# Altium PCB CR-10 Motherboard.PcbDoc (part 9 of 14)
Units mil, origin at the board's own origin, x right, y up, seen from the top; angles counter-clockwise.
Board outline 3970.48 x 2769.68 mil, 2 copper layers (TopLayer, BottomLayer); 147 components, 128 nets, 667 pads, 614 vias.
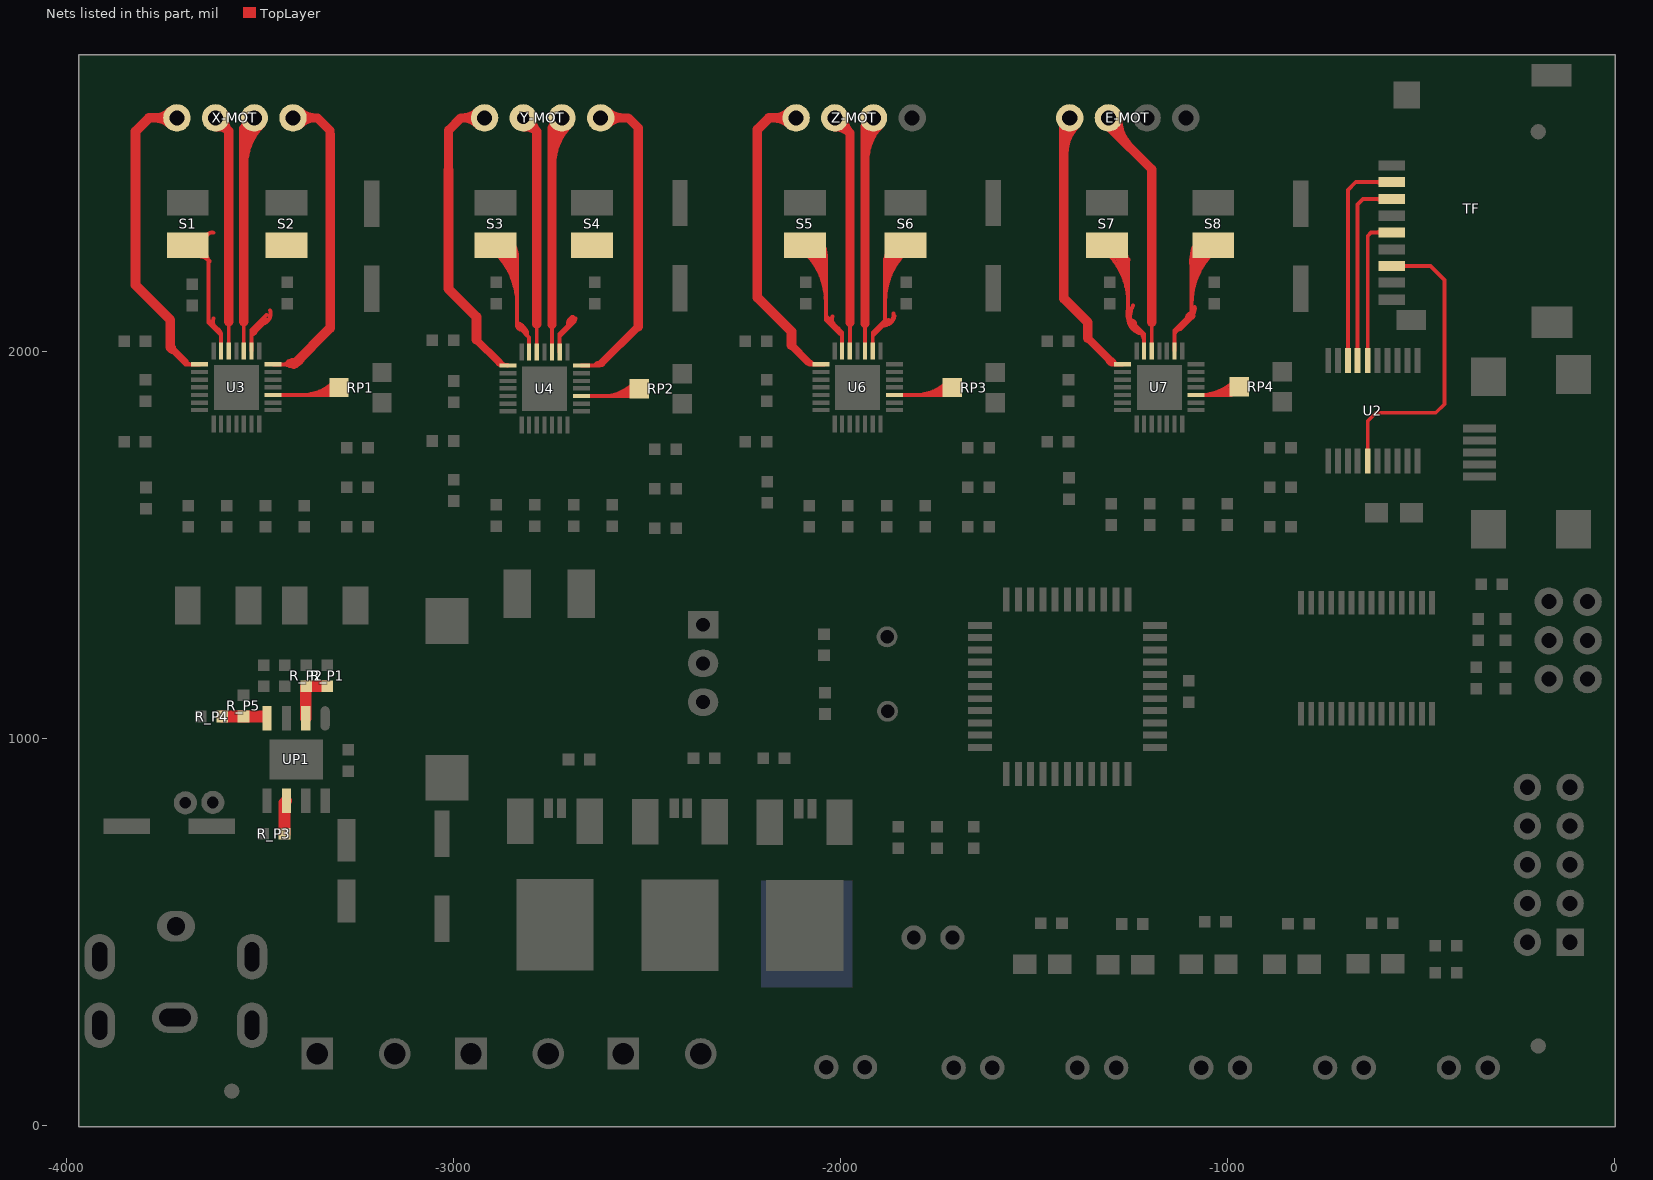
[diagram p9: the nets of this part, all layers, seen from the top]

## Via types
v1: diameter 28, hole 18, TopLayer to BottomLayer, tented both sides, 246 vias
v2: diameter 27.56, hole 19.68, TopLayer to BottomLayer, tented both sides, 196 vias
v3: diameter 20, hole 12, TopLayer to BottomLayer, tented both sides, 124 vias
v4: diameter 27.56, hole 11.81, TopLayer to BottomLayer, tented bottom, 16 vias
v5: diameter 27.56, hole 19.68, TopLayer to BottomLayer, 16 vias
v6: diameter 20, hole 12, TopLayer to BottomLayer, 12 vias
v7: diameter 28, hole 11.81, TopLayer to BottomLayer, tented both sides, 4 vias

## Nets (pads, with @x,y where several pads share a name; then routed paths per layer and width w, separated by ;. In a path a pad name is that pad's centre, name@x,y a point inside that pad or via, vN(x,y) a via of type N, cw(c..) or ccw(c..) an arc to the next point about the centre after c; other vN are vias at no path point) (continued)
NetR_P1_2: R_P1.2 R_P2.1 UP1.2 | length 138.1
  TopLayer w30: UP1.2@-3381.54,1053.14 -3381.54,1134.84 R_P2.1@-3380.54,1135.84 R_P1.2@-3325.54,1135.84
NetR_P3_1: R_P3.1 UP1.6 | length 87.8
  TopLayer w30: R_P3.1@-3436.54,754.84 -3436.54,835.54 UP1.6@-3431.54,840.54
NetR_P4_1: R_P4.1 R_P5.1 UP1.4 | length 111.3
  TopLayer w30: R_P4.1@-3597.54,1057.84 R_P5.1@-3542.54,1057.84 UP1.4@-3486.24,1057.84
NetRP1_1: RP1.1 U3.17 | length 1628.2
  TopLayer w10: U3.17@-3465.62,1888.88 -3314.62,1888.88 RP1.1@-3295.62,1907.88 ; -3389.78,1888.88 ccw(c-3389.78,2002.04) RP1.1@-3309.76,1922.02 ; -3389.78,1888.88 ccw(c-3389.78,2002.04) RP1.1@-3309.76,1922.02 ; -3389.78,1888.88 ccw(c-3389.78,2002.04) RP1.1@-3309.76,1922.02 ; -3389.78,1888.88 ccw(c-3389.78,2002.04) RP1.1@-3309.76,1922.02 ; -3389.78,1888.88 ccw(c-3389.78,2002.04) RP1.1@-3309.76,1922.02 ; -3389.78,1888.88 ccw(c-3389.78,2002.04) RP1.1@-3309.76,1922.02 ; -3365.64,1888.88 ccw(c-3365.64,1977.89) RP1.1@-3302.69,1914.95 ; -3365.64,1888.88 ccw(c-3365.64,1977.89) RP1.1@-3302.69,1914.95 ; -3365.64,1888.88 ccw(c-3365.64,1977.89) RP1.1@-3302.69,1914.95 ; -3365.64,1888.88 ccw(c-3365.64,1977.89) RP1.1@-3302.69,1914.95 ; -3365.64,1888.88 ccw(c-3365.64,1977.89) RP1.1@-3302.69,1914.95 ; -3365.64,1888.88 ccw(c-3365.64,1977.89) RP1.1@-3302.69,1914.95 ; -3341.49,1888.88 ccw(c-3341.49,1953.75) RP1.1@-3295.62,1907.88 ; -3341.49,1888.88 ccw(c-3341.49,1953.75) RP1.1@-3295.62,1907.88 ; -3341.49,1888.88 ccw(c-3341.49,1953.75) RP1.1@-3295.62,1907.88 ; -3341.49,1888.88 ccw(c-3341.49,1953.75) RP1.1@-3295.62,1907.88 ; -3341.49,1888.88 ccw(c-3341.49,1953.75) RP1.1@-3295.62,1907.88 ; -3341.49,1888.88 ccw(c-3341.49,1953.75) RP1.1@-3295.62,1907.88 ; RP1.1@-3317.35,1888.88 ccw(c-3317.35,1929.61) RP1.1@-3288.55,1900.81 ; RP1.1@-3317.35,1888.88 ccw(c-3317.35,1929.61) RP1.1@-3288.55,1900.81 ; RP1.1@-3317.35,1888.88 ccw(c-3317.35,1929.61) RP1.1@-3288.55,1900.81 ; RP1.1@-3317.35,1888.88 ccw(c-3317.35,1929.61) RP1.1@-3288.55,1900.81 ; RP1.1@-3317.35,1888.88 ccw(c-3317.35,1929.61) RP1.1@-3288.55,1900.81 ; RP1.1@-3317.35,1888.88 ccw(c-3317.35,1929.61) RP1.1@-3288.55,1900.81
NetRP2_1: RP2.1 U4.17 | length 1608.2
  TopLayer w10: U4.17@-2669.54,1885.84 -2538.54,1885.84 RP2.1@-2519.54,1904.84 ; -2613.69,1885.84 ccw(c-2613.69,1999) RP2.1@-2533.68,1918.98 ; -2613.69,1885.84 ccw(c-2613.69,1999) RP2.1@-2533.68,1918.98 ; -2613.69,1885.84 ccw(c-2613.69,1999) RP2.1@-2533.68,1918.98 ; -2613.69,1885.84 ccw(c-2613.69,1999) RP2.1@-2533.68,1918.98 ; -2613.69,1885.84 ccw(c-2613.69,1999) RP2.1@-2533.68,1918.98 ; -2613.69,1885.84 ccw(c-2613.69,1999) RP2.1@-2533.68,1918.98 ; -2589.55,1885.84 ccw(c-2589.55,1974.85) RP2.1@-2526.61,1911.91 ; -2589.55,1885.84 ccw(c-2589.55,1974.85) RP2.1@-2526.61,1911.91 ; -2589.55,1885.84 ccw(c-2589.55,1974.85) RP2.1@-2526.61,1911.91 ; -2589.55,1885.84 ccw(c-2589.55,1974.85) RP2.1@-2526.61,1911.91 ; -2589.55,1885.84 ccw(c-2589.55,1974.85) RP2.1@-2526.61,1911.91 ; -2589.55,1885.84 ccw(c-2589.55,1974.85) RP2.1@-2526.61,1911.91 ; -2565.41,1885.84 ccw(c-2565.41,1950.71) RP2.1@-2519.54,1904.84 ; -2565.41,1885.84 ccw(c-2565.41,1950.71) RP2.1@-2519.54,1904.84 ; -2565.41,1885.84 ccw(c-2565.41,1950.71) RP2.1@-2519.54,1904.84 ; -2565.41,1885.84 ccw(c-2565.41,1950.71) RP2.1@-2519.54,1904.84 ; -2565.41,1885.84 ccw(c-2565.41,1950.71) RP2.1@-2519.54,1904.84 ; -2565.41,1885.84 ccw(c-2565.41,1950.71) RP2.1@-2519.54,1904.84 ; RP2.1@-2541.26,1885.84 ccw(c-2541.26,1926.57) RP2.1@-2512.46,1897.77 ; RP2.1@-2541.26,1885.84 ccw(c-2541.26,1926.57) RP2.1@-2512.46,1897.77 ; RP2.1@-2541.26,1885.84 ccw(c-2541.26,1926.57) RP2.1@-2512.46,1897.77 ; RP2.1@-2541.26,1885.84 ccw(c-2541.26,1926.57) RP2.1@-2512.46,1897.77 ; RP2.1@-2541.26,1885.84 ccw(c-2541.26,1926.57) RP2.1@-2512.46,1897.77 ; RP2.1@-2541.26,1885.84 ccw(c-2541.26,1926.57) RP2.1@-2512.46,1897.77
NetRP3_1: RP3.1 U6.17 | length 1608.2
  TopLayer w10: U6.17@-1860.62,1888.88 -1729.62,1888.88 RP3.1@-1710.62,1907.88 ; -1804.78,1888.88 ccw(c-1804.78,2002.04) RP3.1@-1724.76,1922.02 ; -1804.78,1888.88 ccw(c-1804.78,2002.04) RP3.1@-1724.76,1922.02 ; -1804.78,1888.88 ccw(c-1804.78,2002.04) RP3.1@-1724.76,1922.02 ; -1804.78,1888.88 ccw(c-1804.78,2002.04) RP3.1@-1724.76,1922.02 ; -1804.78,1888.88 ccw(c-1804.78,2002.04) RP3.1@-1724.76,1922.02 ; -1804.78,1888.88 ccw(c-1804.78,2002.04) RP3.1@-1724.76,1922.02 ; -1780.64,1888.88 ccw(c-1780.64,1977.89) RP3.1@-1717.69,1914.95 ; -1780.64,1888.88 ccw(c-1780.64,1977.89) RP3.1@-1717.69,1914.95 ; -1780.64,1888.88 ccw(c-1780.64,1977.89) RP3.1@-1717.69,1914.95 ; -1780.64,1888.88 ccw(c-1780.64,1977.89) RP3.1@-1717.69,1914.95 ; -1780.64,1888.88 ccw(c-1780.64,1977.89) RP3.1@-1717.69,1914.95 ; -1780.64,1888.88 ccw(c-1780.64,1977.89) RP3.1@-1717.69,1914.95 ; -1756.49,1888.88 ccw(c-1756.49,1953.75) RP3.1@-1710.62,1907.88 ; -1756.49,1888.88 ccw(c-1756.49,1953.75) RP3.1@-1710.62,1907.88 ; -1756.49,1888.88 ccw(c-1756.49,1953.75) RP3.1@-1710.62,1907.88 ; -1756.49,1888.88 ccw(c-1756.49,1953.75) RP3.1@-1710.62,1907.88 ; -1756.49,1888.88 ccw(c-1756.49,1953.75) RP3.1@-1710.62,1907.88 ; -1756.49,1888.88 ccw(c-1756.49,1953.75) RP3.1@-1710.62,1907.88 ; RP3.1@-1732.35,1888.88 ccw(c-1732.35,1929.61) RP3.1@-1703.55,1900.81 ; RP3.1@-1732.35,1888.88 ccw(c-1732.35,1929.61) RP3.1@-1703.55,1900.81 ; RP3.1@-1732.35,1888.88 ccw(c-1732.35,1929.61) RP3.1@-1703.55,1900.81 ; RP3.1@-1732.35,1888.88 ccw(c-1732.35,1929.61) RP3.1@-1703.55,1900.81 ; RP3.1@-1732.35,1888.88 ccw(c-1732.35,1929.61) RP3.1@-1703.55,1900.81 ; RP3.1@-1732.35,1888.88 ccw(c-1732.35,1929.61) RP3.1@-1703.55,1900.81
NetRP4_1: RP4.1 U7.17 | length 1170.8
  TopLayer w10: U7.17@-1080.62,1888.88 -990.5,1888.88 RP4.1@-969.54,1909.84 ; U7.17@-1068.42,1888.88 ccw(c-1068.42,2008.73) RP4.1@-983.68,1923.98 ; U7.17@-1068.42,1888.88 ccw(c-1068.42,2008.73) RP4.1@-983.68,1923.98 ; U7.17@-1068.42,1888.88 ccw(c-1068.42,2008.73) RP4.1@-983.68,1923.98 ; U7.17@-1068.42,1888.88 ccw(c-1068.42,2008.73) RP4.1@-983.68,1923.98 ; -1044.28,1888.88 ccw(c-1044.28,1984.59) RP4.1@-976.61,1916.91 ; -1044.28,1888.88 ccw(c-1044.28,1984.59) RP4.1@-976.61,1916.91 ; -1044.28,1888.88 ccw(c-1044.28,1984.59) RP4.1@-976.61,1916.91 ; -1044.28,1888.88 ccw(c-1044.28,1984.59) RP4.1@-976.61,1916.91 ; -1020.14,1888.88 ccw(c-1020.14,1960.45) RP4.1@-969.54,1909.84 ; -1020.14,1888.88 ccw(c-1020.14,1960.45) RP4.1@-969.54,1909.84 ; -1020.14,1888.88 ccw(c-1020.14,1960.45) RP4.1@-969.54,1909.84 ; -1020.14,1888.88 ccw(c-1020.14,1960.45) RP4.1@-969.54,1909.84 ; -996,1888.88 ccw(c-996,1936.31) RP4.1@-962.46,1902.77 ; -996,1888.88 ccw(c-996,1936.31) RP4.1@-962.46,1902.77 ; -996,1888.88 ccw(c-996,1936.31) RP4.1@-962.46,1902.77 ; -996,1888.88 ccw(c-996,1936.31) RP4.1@-962.46,1902.77
NetS1_1: S1.1 U3.27 | length 1305.1
  TopLayer w10: S1.1@-3671.54,2275.84 -3632.54,2236.84 -3632.54,2075.84 -3600.62,2043.93 ; S1.1@-3661.17,2248.18 cw(c-3656.55,2218.83) -3635.54,2239.84 cw(c-3620.05,2255.33) S1.1@-3640.01,2264.33 ; S1.1@-3639.54,2295.84 cw(c-3623.54,2291.84) -3619.54,2307.84 ; -3632.54,2082.84 -3609.62,2059.93 cw(c-3601.12,2078.34) -3619.54,2086.84 ; -3620.54,2062.84 cw(c-3620.04,2043.43) -3600.62,2043.93 ; U3.27@-3600.62,2002.88 -3600.62,2043.93 ; S1.1@-3664.75,2247.85 cw(c-3663.4,2199.98) -3629.54,2233.84 ; S1.1@-3664.75,2247.85 cw(c-3663.4,2199.98) -3629.54,2233.84 ; S1.1@-3664.75,2247.85 cw(c-3663.4,2199.98) -3629.54,2233.84 ; S1.1@-3664.75,2247.85 cw(c-3663.4,2199.98) -3629.54,2233.84 ; S1.1@-3664.75,2247.85 cw(c-3663.4,2199.98) -3629.54,2233.84 ; S1.1@-3664.75,2247.85 cw(c-3663.4,2199.98) -3629.54,2233.84 ; S1.1@-3664.75,2247.85 cw(c-3663.4,2199.98) -3629.54,2233.84 ; S1.1@-3664.75,2247.85 cw(c-3663.4,2199.98) -3629.54,2233.84 ; S1.1@-3648.2,2271 ccw(c-3623.49,2264.08) S1.1@-3641.63,2245.94 ; S1.1@-3648.2,2271 ccw(c-3623.49,2264.08) S1.1@-3641.63,2245.94 ; S1.1@-3648.2,2271 ccw(c-3623.49,2264.08) S1.1@-3641.63,2245.94 ; S1.1@-3648.2,2271 ccw(c-3623.49,2264.08) S1.1@-3641.63,2245.94 ; S1.1@-3648.2,2271 ccw(c-3623.49,2264.08) S1.1@-3641.63,2245.94 ; S1.1@-3648.2,2271 ccw(c-3623.49,2264.08) S1.1@-3641.63,2245.94 ; S1.1@-3648.2,2271 ccw(c-3623.49,2264.08) S1.1@-3641.63,2245.94 ; S1.1@-3648.2,2271 ccw(c-3623.49,2264.08) S1.1@-3641.63,2245.94 ; S1.1@-3638.57,2268.3 ccw(c-3604.58,2258.8) -3629.54,2233.84 ; S1.1@-3638.57,2268.3 ccw(c-3604.58,2258.8) -3629.54,2233.84 ; S1.1@-3638.57,2268.3 ccw(c-3604.58,2258.8) -3629.54,2233.84 ; S1.1@-3638.57,2268.3 ccw(c-3604.58,2258.8) -3629.54,2233.84 ; S1.1@-3638.57,2268.3 ccw(c-3604.58,2258.8) -3629.54,2233.84 ; S1.1@-3638.57,2268.3 ccw(c-3604.58,2258.8) -3629.54,2233.84 ; S1.1@-3638.57,2268.3 ccw(c-3604.58,2258.8) -3629.54,2233.84 ; S1.1@-3638.57,2268.3 ccw(c-3604.58,2258.8) -3629.54,2233.84
NetS2_1: S2.1 U3.23 | length 209.3
  TopLayer w10: U3.23@-3521.62,2002.88 -3521.62,2056.76 -3482.54,2095.84 ; -3521.62,2045.84 ccw(c-3520.08,2054.39) -3511.54,2052.84 -3481.54,2082.84 ; -3491.75,2072.63 ccw(c-3500.25,2099.34) -3473.54,2107.84
NetS3_1: S3.1 U4.27 | length 6306.5
  TopLayer w10: S3.1@-2891.54,2275.84 -2869.54,2275.84 -2835.54,2241.84 -2835.54,2068.84 ; S3.1@-2863.18,2248.83 cw(c-2855.56,2220.82) -2835.04,2241.34 cw(c-2813.45,2262.93) S3.1@-2843.23,2269.66 ; -2835.54,2073.84 cw(c-2838.04,2049.14) -2813.33,2046.64 ; -2824.42,2057.73 cw(c-2824.42,2068.84) -2835.54,2068.84 ; -2823.5,2063.81 cw(c-2827,2046.31) -2809.5,2042.81 ; U4.27@-2804.54,1999.84 -2804.54,2037.84 -2835.54,2068.84 ; S3.1@-2890.33,2256.04 cw(c-3022.63,2123.75) -2835.54,2123.75 ; S3.1@-2890.33,2256.04 cw(c-3022.63,2123.75) -2835.54,2123.75 ; S3.1@-2890.33,2256.04 cw(c-3022.63,2123.75) -2835.54,2123.75 ; S3.1@-2890.33,2256.04 cw(c-3022.63,2123.75) -2835.54,2123.75 ; S3.1@-2890.33,2256.04 cw(c-3022.63,2123.75) -2835.54,2123.75 ; S3.1@-2890.33,2256.04 cw(c-3022.63,2123.75) -2835.54,2123.75 ; S3.1@-2890.33,2256.04 cw(c-3022.63,2123.75) -2835.54,2123.75 ; S3.1@-2890.33,2256.04 cw(c-3022.63,2123.75) -2835.54,2123.75 ; S3.1@-2890.33,2256.04 cw(c-3022.63,2123.75) -2835.54,2123.75 ; S3.1@-2883.26,2263.11 cw(c-2998.49,2147.89) -2835.54,2147.89 ; S3.1@-2883.26,2263.11 cw(c-2998.49,2147.89) -2835.54,2147.89 ; S3.1@-2883.26,2263.11 cw(c-2998.49,2147.89) -2835.54,2147.89 ; S3.1@-2883.26,2263.11 cw(c-2998.49,2147.89) -2835.54,2147.89 ; S3.1@-2883.26,2263.11 cw(c-2998.49,2147.89) -2835.54,2147.89 ; S3.1@-2883.26,2263.11 cw(c-2998.49,2147.89) -2835.54,2147.89 ; S3.1@-2883.26,2263.11 cw(c-2998.49,2147.89) -2835.54,2147.89 ; S3.1@-2883.26,2263.11 cw(c-2998.49,2147.89) -2835.54,2147.89 ; S3.1@-2883.26,2263.11 cw(c-2998.49,2147.89) -2835.54,2147.89 ; S3.1@-2876.19,2270.19 cw(c-2974.35,2172.03) -2835.54,2172.03 ; S3.1@-2876.19,2270.19 cw(c-2974.35,2172.03) -2835.54,2172.03 ; S3.1@-2876.19,2270.19 cw(c-2974.35,2172.03) -2835.54,2172.03 ; S3.1@-2876.19,2270.19 cw(c-2974.35,2172.03) -2835.54,2172.03 ; S3.1@-2876.19,2270.19 cw(c-2974.35,2172.03) -2835.54,2172.03 ; S3.1@-2876.19,2270.19 cw(c-2974.35,2172.03) -2835.54,2172.03 ; S3.1@-2876.19,2270.19 cw(c-2974.35,2172.03) -2835.54,2172.03 ; S3.1@-2876.19,2270.19 cw(c-2974.35,2172.03) -2835.54,2172.03 ; S3.1@-2876.19,2270.19 cw(c-2974.35,2172.03) -2835.54,2172.03 ; S3.1@-2869.12,2277.26 cw(c-2950.2,2196.17) -2835.54,2196.17 ; S3.1@-2869.12,2277.26 cw(c-2950.2,2196.17) -2835.54,2196.17 ; S3.1@-2869.12,2277.26 cw(c-2950.2,2196.17) -2835.54,2196.17 ; S3.1@-2869.12,2277.26 cw(c-2950.2,2196.17) -2835.54,2196.17 ; S3.1@-2869.12,2277.26 cw(c-2950.2,2196.17) -2835.54,2196.17 ; S3.1@-2869.12,2277.26 cw(c-2950.2,2196.17) -2835.54,2196.17 ; S3.1@-2869.12,2277.26 cw(c-2950.2,2196.17) -2835.54,2196.17 ; S3.1@-2869.12,2277.26 cw(c-2950.2,2196.17) -2835.54,2196.17 ; S3.1@-2869.12,2277.26 cw(c-2950.2,2196.17) -2835.54,2196.17 ; S3.1@-2862.5,2249.02 cw(c-2854.86,2223.52) -2836.04,2242.34 ; S3.1@-2862.5,2249.02 cw(c-2854.86,2223.52) -2836.04,2242.34 ; S3.1@-2862.5,2249.02 cw(c-2854.86,2223.52) -2836.04,2242.34 ; S3.1@-2862.5,2249.02 cw(c-2854.86,2223.52) -2836.04,2242.34 ; S3.1@-2862.5,2249.02 cw(c-2854.86,2223.52) -2836.04,2242.34 ; S3.1@-2862.5,2249.02 cw(c-2854.86,2223.52) -2836.04,2242.34 ; S3.1@-2862.5,2249.02 cw(c-2854.86,2223.52) -2836.04,2242.34 ; S3.1@-2862.5,2249.02 cw(c-2854.86,2223.52) -2836.04,2242.34 ; S3.1@-2862.05,2284.33 cw(c-2926.06,2220.32) -2835.54,2220.32 ; S3.1@-2862.05,2284.33 cw(c-2926.06,2220.32) -2835.54,2220.32 ; S3.1@-2862.05,2284.33 cw(c-2926.06,2220.32) -2835.54,2220.32 ; S3.1@-2862.05,2284.33 cw(c-2926.06,2220.32) -2835.54,2220.32 ; S3.1@-2862.05,2284.33 cw(c-2926.06,2220.32) -2835.54,2220.32 ; S3.1@-2862.05,2284.33 cw(c-2926.06,2220.32) -2835.54,2220.32 ; S3.1@-2862.05,2284.33 cw(c-2926.06,2220.32) -2835.54,2220.32 ; S3.1@-2862.05,2284.33 cw(c-2926.06,2220.32) -2835.54,2220.32 ; S3.1@-2862.05,2284.33 cw(c-2926.06,2220.32) -2835.54,2220.32 ; S3.1@-2854.98,2291.4 cw(c-2901.92,2244.46) -2835.54,2244.46 ; S3.1@-2854.98,2291.4 cw(c-2901.92,2244.46) -2835.54,2244.46 ; S3.1@-2854.98,2291.4 cw(c-2901.92,2244.46) -2835.54,2244.46 ; S3.1@-2854.98,2291.4 cw(c-2901.92,2244.46) -2835.54,2244.46 ; S3.1@-2854.98,2291.4 cw(c-2901.92,2244.46) -2835.54,2244.46 ; S3.1@-2854.98,2291.4 cw(c-2901.92,2244.46) -2835.54,2244.46 ; S3.1@-2854.98,2291.4 cw(c-2901.92,2244.46) -2835.54,2244.46 ; S3.1@-2854.98,2291.4 cw(c-2901.92,2244.46) -2835.54,2244.46 ; S3.1@-2854.98,2291.4 cw(c-2901.92,2244.46) -2835.54,2244.46 ; S3.1@-2843.39,2268.99 ccw(c-2816.24,2262.14) -2836.04,2242.34 ; S3.1@-2843.39,2268.99 ccw(c-2816.24,2262.14) -2836.04,2242.34 ; S3.1@-2843.39,2268.99 ccw(c-2816.24,2262.14) -2836.04,2242.34 ; S3.1@-2843.39,2268.99 ccw(c-2816.24,2262.14) -2836.04,2242.34 ; S3.1@-2843.39,2268.99 ccw(c-2816.24,2262.14) -2836.04,2242.34 ; S3.1@-2843.39,2268.99 ccw(c-2816.24,2262.14) -2836.04,2242.34 ; S3.1@-2843.39,2268.99 ccw(c-2816.24,2262.14) -2836.04,2242.34 ; S3.1@-2843.39,2268.99 ccw(c-2816.24,2262.14) -2836.04,2242.34
NetS4_1: S4.1 U4.23 | length 242.4
  TopLayer w10: U4.23@-2725.54,1999.84 -2725.54,2029.84 cw(c-2706.3,2032.34) -2725.54,2034.84 -2725.54,2045.84 -2684.88,2086.49 ; -2725.54,2039.84 -2691.54,2073.84 ; -2699.05,2072.33 ccw(c-2699.05,2086.49) -2684.88,2086.49 ; -2690.53,2080.85 -2690.53,2090.85 ccw(c-2685.53,2072.86) -2703.51,2067.86 cw(c-2684.88,2067.86) -2684.88,2086.49
NetS5_1: S5.1 U6.27 | length 5522.6
  TopLayer w10: S5.1@-2091.54,2275.84 -2068.54,2275.84 -2037.54,2244.84 -2037.54,2082.84 -2002.54,2047.84 cw(c-2003.58,2039.89) -1995.62,2038.84 ; -2037.54,2092.84 -1995.62,2050.93 U6.27@-1995.62,2002.88 ; -2020.54,2091.84 ccw(c-1997.24,2083.84) -2005.24,2060.55 ; S5.1@-2090.33,2256.04 cw(c-2217.8,2128.58) -2037.54,2128.58 ; S5.1@-2090.33,2256.04 cw(c-2217.8,2128.58) -2037.54,2128.58 ; S5.1@-2090.33,2256.04 cw(c-2217.8,2128.58) -2037.54,2128.58 ; S5.1@-2090.33,2256.04 cw(c-2217.8,2128.58) -2037.54,2128.58 ; S5.1@-2090.33,2256.04 cw(c-2217.8,2128.58) -2037.54,2128.58 ; S5.1@-2090.33,2256.04 cw(c-2217.8,2128.58) -2037.54,2128.58 ; S5.1@-2090.33,2256.04 cw(c-2217.8,2128.58) -2037.54,2128.58 ; S5.1@-2090.33,2256.04 cw(c-2217.8,2128.58) -2037.54,2128.58 ; S5.1@-2090.33,2256.04 cw(c-2217.8,2128.58) -2037.54,2128.58 ; S5.1@-2083.26,2263.11 cw(c-2193.66,2152.72) -2037.54,2152.72 ; S5.1@-2083.26,2263.11 cw(c-2193.66,2152.72) -2037.54,2152.72 ; S5.1@-2083.26,2263.11 cw(c-2193.66,2152.72) -2037.54,2152.72 ; S5.1@-2083.26,2263.11 cw(c-2193.66,2152.72) -2037.54,2152.72 ; S5.1@-2083.26,2263.11 cw(c-2193.66,2152.72) -2037.54,2152.72 ; S5.1@-2083.26,2263.11 cw(c-2193.66,2152.72) -2037.54,2152.72 ; S5.1@-2083.26,2263.11 cw(c-2193.66,2152.72) -2037.54,2152.72 ; S5.1@-2083.26,2263.11 cw(c-2193.66,2152.72) -2037.54,2152.72 ; S5.1@-2083.26,2263.11 cw(c-2193.66,2152.72) -2037.54,2152.72 ; S5.1@-2076.19,2270.19 cw(c-2169.52,2176.86) -2037.54,2176.86 ; S5.1@-2076.19,2270.19 cw(c-2169.52,2176.86) -2037.54,2176.86 ; S5.1@-2076.19,2270.19 cw(c-2169.52,2176.86) -2037.54,2176.86 ; S5.1@-2076.19,2270.19 cw(c-2169.52,2176.86) -2037.54,2176.86 ; S5.1@-2076.19,2270.19 cw(c-2169.52,2176.86) -2037.54,2176.86 ; S5.1@-2076.19,2270.19 cw(c-2169.52,2176.86) -2037.54,2176.86 ; S5.1@-2076.19,2270.19 cw(c-2169.52,2176.86) -2037.54,2176.86 ; S5.1@-2076.19,2270.19 cw(c-2169.52,2176.86) -2037.54,2176.86 ; S5.1@-2076.19,2270.19 cw(c-2169.52,2176.86) -2037.54,2176.86 ; S5.1@-2069.12,2277.26 cw(c-2145.38,2201) -2037.54,2201 ; S5.1@-2069.12,2277.26 cw(c-2145.38,2201) -2037.54,2201 ; S5.1@-2069.12,2277.26 cw(c-2145.38,2201) -2037.54,2201 ; S5.1@-2069.12,2277.26 cw(c-2145.38,2201) -2037.54,2201 ; S5.1@-2069.12,2277.26 cw(c-2145.38,2201) -2037.54,2201 ; S5.1@-2069.12,2277.26 cw(c-2145.38,2201) -2037.54,2201 ; S5.1@-2069.12,2277.26 cw(c-2145.38,2201) -2037.54,2201 ; S5.1@-2069.12,2277.26 cw(c-2145.38,2201) -2037.54,2201 ; S5.1@-2069.12,2277.26 cw(c-2145.38,2201) -2037.54,2201 ; S5.1@-2062.05,2284.33 cw(c-2121.23,2225.14) -2037.54,2225.14 ; S5.1@-2062.05,2284.33 cw(c-2121.23,2225.14) -2037.54,2225.14 ; S5.1@-2062.05,2284.33 cw(c-2121.23,2225.14) -2037.54,2225.14 ; S5.1@-2062.05,2284.33 cw(c-2121.23,2225.14) -2037.54,2225.14 ; S5.1@-2062.05,2284.33 cw(c-2121.23,2225.14) -2037.54,2225.14 ; S5.1@-2062.05,2284.33 cw(c-2121.23,2225.14) -2037.54,2225.14 ; S5.1@-2062.05,2284.33 cw(c-2121.23,2225.14) -2037.54,2225.14 ; S5.1@-2062.05,2284.33 cw(c-2121.23,2225.14) -2037.54,2225.14 ; S5.1@-2062.05,2284.33 cw(c-2121.23,2225.14) -2037.54,2225.14 ; S5.1@-2054.98,2291.4 cw(c-2097.09,2249.29) -2037.54,2249.29 ; S5.1@-2054.98,2291.4 cw(c-2097.09,2249.29) -2037.54,2249.29 ; S5.1@-2054.98,2291.4 cw(c-2097.09,2249.29) -2037.54,2249.29 ; S5.1@-2054.98,2291.4 cw(c-2097.09,2249.29) -2037.54,2249.29 ; S5.1@-2054.98,2291.4 cw(c-2097.09,2249.29) -2037.54,2249.29 ; S5.1@-2054.98,2291.4 cw(c-2097.09,2249.29) -2037.54,2249.29 ; S5.1@-2054.98,2291.4 cw(c-2097.09,2249.29) -2037.54,2249.29 ; S5.1@-2054.98,2291.4 cw(c-2097.09,2249.29) -2037.54,2249.29 ; S5.1@-2054.98,2291.4 cw(c-2097.09,2249.29) -2037.54,2249.29
NetS6_1: S6.1 U6.23 | length 5462.5
  TopLayer w10: U6.23@-1916.62,2002.88 -1916.62,2048.76 -1884.54,2080.84 -1884.54,2240.84 -1849.54,2275.84 S6.1@-1831.54,2275.84 ; -1913.54,2044.84 -1875.54,2082.84 ; -1896.41,2068.97 ccw(c-1889.91,2099.34) -1859.54,2092.84 ; -1889.47,2068.91 ccw(c-1891.47,2097.84) -1862.54,2099.84 ; -1884.54,2130.99 cw(c-1707.68,2130.99) S6.1@-1832.74,2256.04 ; -1884.54,2130.99 cw(c-1707.68,2130.99) S6.1@-1832.74,2256.04 ; -1884.54,2130.99 cw(c-1707.68,2130.99) S6.1@-1832.74,2256.04 ; -1884.54,2130.99 cw(c-1707.68,2130.99) S6.1@-1832.74,2256.04 ; -1884.54,2130.99 cw(c-1707.68,2130.99) S6.1@-1832.74,2256.04 ; -1884.54,2130.99 cw(c-1707.68,2130.99) S6.1@-1832.74,2256.04 ; -1884.54,2130.99 cw(c-1707.68,2130.99) S6.1@-1832.74,2256.04 ; -1884.54,2130.99 cw(c-1707.68,2130.99) S6.1@-1832.74,2256.04 ; -1884.54,2130.99 cw(c-1707.68,2130.99) S6.1@-1832.74,2256.04 ; -1884.54,2155.13 cw(c-1731.82,2155.13) S6.1@-1839.81,2263.11 ; -1884.54,2155.13 cw(c-1731.82,2155.13) S6.1@-1839.81,2263.11 ; -1884.54,2155.13 cw(c-1731.82,2155.13) S6.1@-1839.81,2263.11 ; -1884.54,2155.13 cw(c-1731.82,2155.13) S6.1@-1839.81,2263.11 ; -1884.54,2155.13 cw(c-1731.82,2155.13) S6.1@-1839.81,2263.11 ; -1884.54,2155.13 cw(c-1731.82,2155.13) S6.1@-1839.81,2263.11 ; -1884.54,2155.13 cw(c-1731.82,2155.13) S6.1@-1839.81,2263.11 ; -1884.54,2155.13 cw(c-1731.82,2155.13) S6.1@-1839.81,2263.11 ; -1884.54,2155.13 cw(c-1731.82,2155.13) S6.1@-1839.81,2263.11 ; -1884.54,2179.27 cw(c-1755.97,2179.27) S6.1@-1846.88,2270.19 ; -1884.54,2179.27 cw(c-1755.97,2179.27) S6.1@-1846.88,2270.19 ; -1884.54,2179.27 cw(c-1755.97,2179.27) S6.1@-1846.88,2270.19 ; -1884.54,2179.27 cw(c-1755.97,2179.27) S6.1@-1846.88,2270.19 ; -1884.54,2179.27 cw(c-1755.97,2179.27) S6.1@-1846.88,2270.19 ; -1884.54,2179.27 cw(c-1755.97,2179.27) S6.1@-1846.88,2270.19 ; -1884.54,2179.27 cw(c-1755.97,2179.27) S6.1@-1846.88,2270.19 ; -1884.54,2179.27 cw(c-1755.97,2179.27) S6.1@-1846.88,2270.19 ; -1884.54,2179.27 cw(c-1755.97,2179.27) S6.1@-1846.88,2270.19 ; -1884.54,2203.42 cw(c-1780.11,2203.42) S6.1@-1853.95,2277.26 ; -1884.54,2203.42 cw(c-1780.11,2203.42) S6.1@-1853.95,2277.26 ; -1884.54,2203.42 cw(c-1780.11,2203.42) S6.1@-1853.95,2277.26 ; -1884.54,2203.42 cw(c-1780.11,2203.42) S6.1@-1853.95,2277.26 ; -1884.54,2203.42 cw(c-1780.11,2203.42) S6.1@-1853.95,2277.26 ; -1884.54,2203.42 cw(c-1780.11,2203.42) S6.1@-1853.95,2277.26 ; -1884.54,2203.42 cw(c-1780.11,2203.42) S6.1@-1853.95,2277.26 ; -1884.54,2203.42 cw(c-1780.11,2203.42) S6.1@-1853.95,2277.26 ; -1884.54,2203.42 cw(c-1780.11,2203.42) S6.1@-1853.95,2277.26 ; -1884.54,2227.56 cw(c-1804.25,2227.56) S6.1@-1861.02,2284.33 ; -1884.54,2227.56 cw(c-1804.25,2227.56) S6.1@-1861.02,2284.33 ; -1884.54,2227.56 cw(c-1804.25,2227.56) S6.1@-1861.02,2284.33 ; -1884.54,2227.56 cw(c-1804.25,2227.56) S6.1@-1861.02,2284.33 ; -1884.54,2227.56 cw(c-1804.25,2227.56) S6.1@-1861.02,2284.33 ; -1884.54,2227.56 cw(c-1804.25,2227.56) S6.1@-1861.02,2284.33 ; -1884.54,2227.56 cw(c-1804.25,2227.56) S6.1@-1861.02,2284.33 ; -1884.54,2227.56 cw(c-1804.25,2227.56) S6.1@-1861.02,2284.33 ; -1884.54,2227.56 cw(c-1804.25,2227.56) S6.1@-1861.02,2284.33 ; -1883.03,2242.34 cw(c-1865.71,2225.02) S6.1@-1859.56,2248.74 ; -1883.03,2242.34 ccw(c-1897.92,2257.23) S6.1@-1878.44,2265.22 ; -1883.03,2242.34 cw(c-1865.71,2225.02) S6.1@-1859.56,2248.74 ; -1883.03,2242.34 ccw(c-1897.92,2257.23) S6.1@-1878.44,2265.22 ; -1883.03,2242.34 cw(c-1865.71,2225.02) S6.1@-1859.56,2248.74 ; -1883.03,2242.34 ccw(c-1897.92,2257.23) S6.1@-1878.44,2265.22 ; -1883.03,2242.34 cw(c-1865.71,2225.02) S6.1@-1859.56,2248.74 ; -1883.03,2242.34 ccw(c-1897.92,2257.23) S6.1@-1878.44,2265.22 ; -1883.03,2242.34 cw(c-1865.71,2225.02) S6.1@-1859.56,2248.74 ; -1883.03,2242.34 ccw(c-1897.92,2257.23) S6.1@-1878.44,2265.22 ; -1883.03,2242.34 ccw(c-1897.92,2257.23) S6.1@-1878.44,2265.22 ; -1883.03,2242.34 cw(c-1865.71,2225.02) S6.1@-1859.56,2248.74 ; -1883.03,2242.34 ccw(c-1897.92,2257.23) S6.1@-1878.44,2265.22 ; -1883.03,2242.34 cw(c-1865.71,2225.02) S6.1@-1859.56,2248.74 ; -1883.03,2242.34 ccw(c-1897.92,2257.23) S6.1@-1878.44,2265.22 ; -1883.03,2242.34 cw(c-1865.71,2225.02) S6.1@-1859.56,2248.74 ; -1883.03,2242.34 ccw(c-1897.92,2257.23) S6.1@-1878.44,2265.22 ; -1883.03,2242.34 cw(c-1865.71,2225.02) S6.1@-1859.56,2248.74
NetS7_1: S7.1 U7.27 | length 4566.8
  TopLayer w10: S7.1@-1311.54,2275.84 -1293.54,2275.84 -1256.54,2238.84 -1256.54,2087.84 ; S7.1@-1284.91,2248.41 cw(c-1278.97,2219.41) -1258.04,2240.34 cw(c-1240.05,2258.33) S7.1@-1264.08,2266.67 ; -1256.54,2110.84 ccw(c-1227.54,2098.84) -1239.54,2069.84 ; -1247.54,2062.84 cw(c-1253.08,2025.39) U7.27@-1215.62,2019.84 ; -1243.54,2079.84 cw(c-1246.04,2072.83) -1239.02,2070.33 ; -1243.54,2119.84 ccw(c-1204.04,2094.34) -1229.54,2054.84 ; U7.27@-1215.62,2002.88 -1215.62,2046.93 ; S7.1@-1310.33,2256.04 cw(c-1440.22,2126.16) -1256.54,2126.16 ; S7.1@-1310.33,2256.04 cw(c-1440.22,2126.16) -1256.54,2126.16 ; S7.1@-1310.33,2256.04 cw(c-1440.22,2126.16) -1256.54,2126.16 ; S7.1@-1310.33,2256.04 cw(c-1440.22,2126.16) -1256.54,2126.16 ; S7.1@-1310.33,2256.04 cw(c-1440.22,2126.16) -1256.54,2126.16 ; S7.1@-1310.33,2256.04 cw(c-1440.22,2126.16) -1256.54,2126.16 ; S7.1@-1303.26,2263.11 cw(c-1416.07,2150.3) -1256.54,2150.3 ; S7.1@-1303.26,2263.11 cw(c-1416.07,2150.3) -1256.54,2150.3 ; S7.1@-1303.26,2263.11 cw(c-1416.07,2150.3) -1256.54,2150.3 ; S7.1@-1303.26,2263.11 cw(c-1416.07,2150.3) -1256.54,2150.3 ; S7.1@-1303.26,2263.11 cw(c-1416.07,2150.3) -1256.54,2150.3 ; S7.1@-1303.26,2263.11 cw(c-1416.07,2150.3) -1256.54,2150.3 ; S7.1@-1296.19,2270.19 cw(c-1391.93,2174.45) -1256.54,2174.45 ; S7.1@-1296.19,2270.19 cw(c-1391.93,2174.45) -1256.54,2174.45 ; S7.1@-1296.19,2270.19 cw(c-1391.93,2174.45) -1256.54,2174.45 ; S7.1@-1296.19,2270.19 cw(c-1391.93,2174.45) -1256.54,2174.45 ; S7.1@-1296.19,2270.19 cw(c-1391.93,2174.45) -1256.54,2174.45 ; S7.1@-1296.19,2270.19 cw(c-1391.93,2174.45) -1256.54,2174.45 ; S7.1@-1289.12,2277.26 cw(c-1367.79,2198.59) -1256.54,2198.59 ; S7.1@-1289.12,2277.26 cw(c-1367.79,2198.59) -1256.54,2198.59 ; S7.1@-1289.12,2277.26 cw(c-1367.79,2198.59) -1256.54,2198.59 ; S7.1@-1289.12,2277.26 cw(c-1367.79,2198.59) -1256.54,2198.59 ; S7.1@-1289.12,2277.26 cw(c-1367.79,2198.59) -1256.54,2198.59 ; S7.1@-1289.12,2277.26 cw(c-1367.79,2198.59) -1256.54,2198.59 ; S7.1@-1286.82,2248.09 cw(c-1281.79,2210.59) -1255.04,2237.34 ; S7.1@-1286.82,2248.09 cw(c-1281.79,2210.59) -1255.04,2237.34 ; S7.1@-1286.82,2248.09 cw(c-1281.79,2210.59) -1255.04,2237.34 ; S7.1@-1286.82,2248.09 cw(c-1281.79,2210.59) -1255.04,2237.34 ; S7.1@-1286.82,2248.09 cw(c-1281.79,2210.59) -1255.04,2237.34 ; S7.1@-1286.82,2248.09 cw(c-1281.79,2210.59) -1255.04,2237.34 ; S7.1@-1286.82,2248.09 cw(c-1281.79,2210.59) -1255.04,2237.34 ; S7.1@-1286.82,2248.09 cw(c-1281.79,2210.59) -1255.04,2237.34 ; S7.1@-1282.05,2284.33 cw(c-1343.65,2222.73) -1256.54,2222.73 ; S7.1@-1282.05,2284.33 cw(c-1343.65,2222.73) -1256.54,2222.73 ; S7.1@-1282.05,2284.33 cw(c-1343.65,2222.73) -1256.54,2222.73 ; S7.1@-1282.05,2284.33 cw(c-1343.65,2222.73) -1256.54,2222.73 ; S7.1@-1282.05,2284.33 cw(c-1343.65,2222.73) -1256.54,2222.73 ; S7.1@-1282.05,2284.33 cw(c-1343.65,2222.73) -1256.54,2222.73 ; S7.1@-1273.14,2271.23 ccw(c-1251.47,2265.48) S7.1@-1267.32,2249.63 ; S7.1@-1273.14,2271.23 ccw(c-1251.47,2265.48) S7.1@-1267.32,2249.63 ; S7.1@-1273.14,2271.23 ccw(c-1251.47,2265.48) S7.1@-1267.32,2249.63 ; S7.1@-1273.14,2271.23 ccw(c-1251.47,2265.48) S7.1@-1267.32,2249.63 ; S7.1@-1273.14,2271.23 ccw(c-1251.47,2265.48) S7.1@-1267.32,2249.63 ; S7.1@-1273.14,2271.23 ccw(c-1251.47,2265.48) S7.1@-1267.32,2249.63 ; S7.1@-1273.14,2271.23 ccw(c-1251.47,2265.48) S7.1@-1267.32,2249.63 ; S7.1@-1273.14,2271.23 ccw(c-1251.47,2265.48) S7.1@-1267.32,2249.63 ; S7.1@-1263.47,2268.66 ccw(c-1232.05,2260.33) -1255.04,2237.34 ; S7.1@-1263.47,2268.66 ccw(c-1232.05,2260.33) -1255.04,2237.34 ; S7.1@-1263.47,2268.66 ccw(c-1232.05,2260.33) -1255.04,2237.34 ; S7.1@-1263.47,2268.66 ccw(c-1232.05,2260.33) -1255.04,2237.34 ; S7.1@-1263.47,2268.66 ccw(c-1232.05,2260.33) -1255.04,2237.34 ; S7.1@-1263.47,2268.66 ccw(c-1232.05,2260.33) -1255.04,2237.34 ; S7.1@-1263.47,2268.66 ccw(c-1232.05,2260.33) -1255.04,2237.34 ; S7.1@-1263.47,2268.66 ccw(c-1232.05,2260.33) -1255.04,2237.34 ; -1256.54,2087.84 ccw(c-1215.62,2087.84) -1215.62,2046.93 ; -1256.54,2087.84 -1215.62,2046.93
NetS8_1: S8.1 U7.23 | length 6559.1
  TopLayer w10: U7.23@-1136.62,2002.88 -1136.62,2055.76 -1105.29,2087.08 ; -1136.62,2040.84 cw(c-1119.32,2042.3) -1120.78,2059.6 -1087.54,2092.84 cw(c-1099.29,2098.84) -1105.29,2087.08 ; -1092.54,2222.84 cw(c-1041.04,2236.34) S8.1@-1054.54,2287.84 ; -1092.54,2232.84 ccw(c-1105.04,2261.34) -1073.98,2259.4 ccw(c-1105.04,2261.34) S8.1@-1076.54,2273.84 ; -1084.54,2116.84 cw(c-1109.79,2112.34) -1105.29,2087.08 ; S8.1@-1084.54,2254.84 ccw(c-1081.54,2243.84) -1092.54,2240.84 ; S8.1@-1036.54,2275.84 -1057.54,2275.84 -1092.54,2240.84 ; -1105.29,2087.08 cw(c-1092.54,2087.08) -1092.54,2099.84 ; -1105.29,2087.08 -1092.54,2099.84 ; -1092.54,2099.84 -1092.54,2240.84 ; -1092.54,2123.75 cw(c-905.44,2123.75) S8.1@-1037.74,2256.04 ; -1092.54,2123.75 cw(c-905.44,2123.75) S8.1@-1037.74,2256.04 ; -1092.54,2123.75 cw(c-905.44,2123.75) S8.1@-1037.74,2256.04 ; -1092.54,2123.75 cw(c-905.44,2123.75) S8.1@-1037.74,2256.04 ; -1092.54,2123.75 cw(c-905.44,2123.75) S8.1@-1037.74,2256.04 ; -1092.54,2123.75 cw(c-905.44,2123.75) S8.1@-1037.74,2256.04 ; -1092.54,2123.75 cw(c-905.44,2123.75) S8.1@-1037.74,2256.04 ; -1092.54,2123.75 cw(c-905.44,2123.75) S8.1@-1037.74,2256.04 ; -1092.54,2123.75 cw(c-905.44,2123.75) S8.1@-1037.74,2256.04 ; -1092.54,2147.89 cw(c-929.58,2147.89) S8.1@-1044.81,2263.11 ; -1092.54,2147.89 cw(c-929.58,2147.89) S8.1@-1044.81,2263.11 ; -1092.54,2147.89 cw(c-929.58,2147.89) S8.1@-1044.81,2263.11 ; -1092.54,2147.89 cw(c-929.58,2147.89) S8.1@-1044.81,2263.11 ; -1092.54,2147.89 cw(c-929.58,2147.89) S8.1@-1044.81,2263.11 ; -1092.54,2147.89 cw(c-929.58,2147.89) S8.1@-1044.81,2263.11 ; -1092.54,2147.89 cw(c-929.58,2147.89) S8.1@-1044.81,2263.11 ; -1092.54,2147.89 cw(c-929.58,2147.89) S8.1@-1044.81,2263.11 ; -1092.54,2147.89 cw(c-929.58,2147.89) S8.1@-1044.81,2263.11 ; -1092.54,2172.03 cw(c-953.72,2172.03) S8.1@-1051.88,2270.19 ; -1092.54,2172.03 cw(c-953.72,2172.03) S8.1@-1051.88,2270.19 ; -1092.54,2172.03 cw(c-953.72,2172.03) S8.1@-1051.88,2270.19 ; -1092.54,2172.03 cw(c-953.72,2172.03) S8.1@-1051.88,2270.19 ; -1092.54,2172.03 cw(c-953.72,2172.03) S8.1@-1051.88,2270.19 ; -1092.54,2172.03 cw(c-953.72,2172.03) S8.1@-1051.88,2270.19 ; -1092.54,2172.03 cw(c-953.72,2172.03) S8.1@-1051.88,2270.19 ; -1092.54,2172.03 cw(c-953.72,2172.03) S8.1@-1051.88,2270.19 ; -1092.54,2172.03 cw(c-953.72,2172.03) S8.1@-1051.88,2270.19 ; -1092.54,2196.17 cw(c-977.87,2196.17) S8.1@-1058.95,2277.26 ; -1092.54,2196.17 cw(c-977.87,2196.17) S8.1@-1058.95,2277.26 ; -1092.54,2196.17 cw(c-977.87,2196.17) S8.1@-1058.95,2277.26 ; -1092.54,2196.17 cw(c-977.87,2196.17) S8.1@-1058.95,2277.26 ; -1092.54,2196.17 cw(c-977.87,2196.17) S8.1@-1058.95,2277.26 ; -1092.54,2196.17 cw(c-977.87,2196.17) S8.1@-1058.95,2277.26 ; -1092.54,2196.17 cw(c-977.87,2196.17) S8.1@-1058.95,2277.26 ; -1092.54,2196.17 cw(c-977.87,2196.17) S8.1@-1058.95,2277.26 ; -1092.54,2196.17 cw(c-977.87,2196.17) S8.1@-1058.95,2277.26 ; -1092.54,2220.32 cw(c-1002.01,2220.32) S8.1@-1066.02,2284.33 ; -1092.54,2220.32 cw(c-1002.01,2220.32) S8.1@-1066.02,2284.33 ; -1092.54,2220.32 cw(c-1002.01,2220.32) S8.1@-1066.02,2284.33 ; -1092.54,2220.32 cw(c-1002.01,2220.32) S8.1@-1066.02,2284.33 ; -1092.54,2220.32 cw(c-1002.01,2220.32) S8.1@-1066.02,2284.33 ; -1092.54,2220.32 cw(c-1002.01,2220.32) S8.1@-1066.02,2284.33 ; -1092.54,2220.32 cw(c-1002.01,2220.32) S8.1@-1066.02,2284.33 ; -1092.54,2220.32 cw(c-1002.01,2220.32) S8.1@-1066.02,2284.33 ; -1092.54,2220.32 cw(c-1002.01,2220.32) S8.1@-1066.02,2284.33 ; -1092.53,2240.84 cw(c-1071.5,2219.81) S8.1@-1064.31,2248.67 ; -1092.53,2240.84 ccw(c-1113.57,2261.88) S8.1@-1084.7,2269.07 ; -1092.53,2240.84 cw(c-1071.5,2219.81) S8.1@-1064.31,2248.67 ; -1092.53,2240.84 ccw(c-1113.57,2261.88) S8.1@-1084.7,2269.07 ; -1092.53,2240.84 cw(c-1071.5,2219.81) S8.1@-1064.31,2248.67 ; -1092.53,2240.84 ccw(c-1113.57,2261.88) S8.1@-1084.7,2269.07 ; -1092.53,2240.84 cw(c-1071.5,2219.81) S8.1@-1064.31,2248.67 ; -1092.53,2240.84 ccw(c-1113.57,2261.88) S8.1@-1084.7,2269.07 ; -1092.53,2240.84 cw(c-1071.5,2219.81) S8.1@-1064.31,2248.67 ; -1092.53,2240.84 ccw(c-1113.57,2261.88) S8.1@-1084.7,2269.07 ; -1092.53,2240.84 ccw(c-1113.57,2261.88) S8.1@-1084.7,2269.07 ; -1092.53,2240.84 cw(c-1071.5,2219.81) S8.1@-1064.31,2248.67 ; -1092.53,2240.84 ccw(c-1113.57,2261.88) S8.1@-1084.7,2269.07 ; -1092.53,2240.84 cw(c-1071.5,2219.81) S8.1@-1064.31,2248.67 ; -1092.53,2240.84 ccw(c-1113.57,2261.88) S8.1@-1084.7,2269.07 ; -1092.53,2240.84 cw(c-1071.5,2219.81) S8.1@-1064.31,2248.67 ; -1092.53,2240.84 ccw(c-1113.57,2261.88) S8.1@-1084.7,2269.07 ; -1092.53,2240.84 cw(c-1071.5,2219.81) S8.1@-1064.31,2248.67 ; -1092.54,2244.46 cw(c-1026.15,2244.46) S8.1@-1073.09,2291.4 ; -1092.54,2244.46 cw(c-1026.15,2244.46) S8.1@-1073.09,2291.4 ; -1092.54,2244.46 cw(c-1026.15,2244.46) S8.1@-1073.09,2291.4 ; -1092.54,2244.46 cw(c-1026.15,2244.46) S8.1@-1073.09,2291.4 ; -1092.54,2244.46 cw(c-1026.15,2244.46) S8.1@-1073.09,2291.4 ; -1092.54,2244.46 cw(c-1026.15,2244.46) S8.1@-1073.09,2291.4 ; -1092.54,2244.46 cw(c-1026.15,2244.46) S8.1@-1073.09,2291.4 ; -1092.54,2244.46 cw(c-1026.15,2244.46) S8.1@-1073.09,2291.4 ; -1092.54,2244.46 cw(c-1026.15,2244.46) S8.1@-1073.09,2291.4
NetU2_2: TF.3 U2.17 | length 573.5
  TopLayer w10: U2.17@-663.54,1961.84 -663.54,2380.84 -649.54,2394.84 TF.3@-575.54,2394.84 ; -615.85,2394.84 cw(c-615.85,2375.53) -602.19,2389.19 ccw(c-615.85,2375.53) -615.85,2394.84 ; -615.85,2394.84 ccw(c-615.85,2414.16) -602.19,2400.5 cw(c-615.85,2414.16) -615.85,2394.84
NetU2_4: TF.5 U2.16 | length 464.4
  TopLayer w10: U2.16@-637.54,1961.84 -637.54,2299.84 -628.54,2308.84 TF.5@-575.54,2308.84 ; -615.85,2308.84 cw(c-615.85,2289.53) -602.19,2303.19 ccw(c-615.85,2289.53) -615.85,2308.84 ; -615.85,2308.84 ccw(c-615.85,2328.16) -602.19,2314.5 cw(c-615.85,2328.16) -615.85,2308.84
NetU2_6: TF.2 U2.18 | length 639
  TopLayer w10: U2.18@-688.54,1961.84 -688.54,2418.84 -668.54,2438.84 TF.2@-575.54,2438.84 ; -615.85,2438.84 cw(c-615.85,2419.53) -602.19,2433.19 ccw(c-615.85,2419.53) -615.85,2438.84 ; -615.85,2438.84 ccw(c-615.85,2458.16) -602.19,2444.5 cw(c-615.85,2458.16) -615.85,2438.84
NetU2_7: TF.7 U2.5 | length 775.7
  TopLayer w10: U2.5@-637.54,1733.84 -637.54,1821.84 -616.54,1842.84 -461.54,1842.84 -439.54,1864.84 -439.54,2185.84 -475.54,2221.84 TF.7@-575.54,2221.84
NetU3_1: U3.1 X-MOT.1 | length 1533.4
  TopLayer w10: -3739.54,2013.84 ccw(c-3721.86,2016.82) -3718.88,1999.14 ; -3729.54,2004.79 -3692.62,1967.88 U3.1@-3655.62,1967.88 ; -3723.54,2010.84 -3689.54,1976.84 ccw(c-3682.05,1975.36) -3683.54,1967.88 ; -3721.54,2011.84 -3721.54,2012.84 ; -3694.77,1982.08 ccw(c-3675.55,1987.1) U3.1@-3670.54,1967.88
  TopLayer w25: -3821.54,2476.84 -3821.54,2569.84 -3786.54,2604.84 X-MOT.1@-3714.54,2604.84 ; -3821.54,2567.02 -3821.54,2172.84 -3731.54,2082.84 -3731.54,2016.84 ; -3769.9,2604.84 cw(c-3769.9,2549.48) X-MOT.1@-3730.75,2588.63 ; -3769.9,2604.84 ccw(c-3769.9,2660.21) X-MOT.1@-3730.75,2621.06 ; -3769.9,2604.84 cw(c-3769.9,2549.48) X-MOT.1@-3730.75,2588.63 ; -3769.9,2604.84 ccw(c-3769.9,2660.21) X-MOT.1@-3730.75,2621.06 ; -3769.9,2604.84 cw(c-3769.9,2549.48) X-MOT.1@-3730.75,2588.63 ; -3769.9,2604.84 ccw(c-3769.9,2660.21) X-MOT.1@-3730.75,2621.06 ; -3769.9,2604.84 ccw(c-3769.9,2660.21) X-MOT.1@-3730.75,2621.06 ; -3769.9,2604.84 cw(c-3769.9,2549.48) X-MOT.1@-3730.75,2588.63 ; -3769.9,2604.84 ccw(c-3769.9,2660.21) X-MOT.1@-3730.75,2621.06 ; -3769.9,2604.84 cw(c-3769.9,2549.48) X-MOT.1@-3730.75,2588.63 ; -3769.9,2604.84 ccw(c-3769.9,2660.21) X-MOT.1@-3730.75,2621.06 ; -3769.9,2604.84 cw(c-3769.9,2549.48) X-MOT.1@-3730.75,2588.63
NetU3_26: U3.26 X-MOT.2 | length 1021
  TopLayer w10: U3.26@-3580.62,2002.88 -3580.62,2077.84
  TopLayer w23.62: X-MOT.2@-3614.54,2604.84 -3580.62,2570.93 ; -3580.62,2077.84 -3580.62,2570.93 ; X-MOT.2@-3611.47,2581.42 cw(c-3606.7,2544.86) -3580.62,2570.93 ; X-MOT.2@-3611.47,2581.42 cw(c-3606.7,2544.86) -3580.62,2570.93 ; X-MOT.2@-3611.47,2581.42 cw(c-3606.7,2544.86) -3580.62,2570.93 ; X-MOT.2@-3611.47,2581.42 cw(c-3606.7,2544.86) -3580.62,2570.93 ; X-MOT.2@-3611.47,2581.42 cw(c-3606.7,2544.86) -3580.62,2570.93 ; X-MOT.2@-3611.47,2581.42 cw(c-3606.7,2544.86) -3580.62,2570.93 ; X-MOT.2@-3591.11,2601.78 ccw(c-3554.55,2597) -3580.62,2570.93 ; X-MOT.2@-3591.11,2601.78 ccw(c-3554.55,2597) -3580.62,2570.93 ; X-MOT.2@-3591.11,2601.78 ccw(c-3554.55,2597) -3580.62,2570.93 ; X-MOT.2@-3591.11,2601.78 ccw(c-3554.55,2597) -3580.62,2570.93 ; X-MOT.2@-3591.11,2601.78 ccw(c-3554.55,2597) -3580.62,2570.93 ; X-MOT.2@-3591.11,2601.78 ccw(c-3554.55,2597) -3580.62,2570.93
NetU4_1: U4.1 Y-MOT.1 | length 1403.6
  TopLayer w10: U4.1@-2870.54,1965.84 ccw(c-2879.54,1963.84) -2881.54,1972.84 ccw(c-2876.54,1970.84) -2878.54,1965.84 -2860.54,1965.84 U4.1@-2860.04,1965.34
  TopLayer w20: -2940.54,2031.84 -2881.54,1972.84
  TopLayer w23.62: -3012.54,2406.84 -3012.54,2572.84 -2980.54,2604.84 Y-MOT.1@-2919.54,2604.84 ; -2976.56,2604.84 cw(c-2976.56,2547.81) Y-MOT.1@-2936.24,2588.14 ; -2976.56,2604.84 ccw(c-2976.56,2661.87) Y-MOT.1@-2936.24,2621.55 ; -2976.56,2604.84 cw(c-2976.56,2547.81) Y-MOT.1@-2936.24,2588.14 ; -2976.56,2604.84 ccw(c-2976.56,2661.87) Y-MOT.1@-2936.24,2621.55 ; -2976.56,2604.84 cw(c-2976.56,2547.81) Y-MOT.1@-2936.24,2588.14 ; -2976.56,2604.84 ccw(c-2976.56,2661.87) Y-MOT.1@-2936.24,2621.55 ; -2976.56,2604.84 ccw(c-2976.56,2661.87) Y-MOT.1@-2936.24,2621.55 ; -2976.56,2604.84 cw(c-2976.56,2547.81) Y-MOT.1@-2936.24,2588.14 ; -2976.56,2604.84 ccw(c-2976.56,2661.87) Y-MOT.1@-2936.24,2621.55 ; -2976.56,2604.84 cw(c-2976.56,2547.81) Y-MOT.1@-2936.24,2588.14 ; -2976.56,2604.84 ccw(c-2976.56,2661.87) Y-MOT.1@-2936.24,2621.55 ; -2976.56,2604.84 cw(c-2976.56,2547.81) Y-MOT.1@-2936.24,2588.14
  TopLayer w25: -3012.54,2470.84 -3012.54,2162.84 -2940.54,2090.84 -2940.54,2031.84
NetU4_26: U4.26 Y-MOT.2 | length 1042.4
  TopLayer w10: U4.26@-2784.54,1999.84 -2784.54,2071.84
  TopLayer w23.62: Y-MOT.2@-2819.54,2604.84 -2784.54,2569.84 ; -2784.54,2071.84 -2784.54,2101.84 ; -2784.54,2106.84 -2784.54,2569.84 ; Y-MOT.2@-2817.06,2581.35 cw(c-2812.85,2541.53) -2784.54,2569.84 ; Y-MOT.2@-2817.06,2581.35 cw(c-2812.85,2541.53) -2784.54,2569.84 ; Y-MOT.2@-2817.06,2581.35 cw(c-2812.85,2541.53) -2784.54,2569.84 ; Y-MOT.2@-2817.06,2581.35 cw(c-2812.85,2541.53) -2784.54,2569.84 ; Y-MOT.2@-2817.06,2581.35 cw(c-2812.85,2541.53) -2784.54,2569.84 ; Y-MOT.2@-2817.06,2581.35 cw(c-2812.85,2541.53) -2784.54,2569.84 ; Y-MOT.2@-2796.04,2602.36 ccw(c-2756.22,2598.16) -2784.54,2569.84 ; Y-MOT.2@-2796.04,2602.36 ccw(c-2756.22,2598.16) -2784.54,2569.84 ; Y-MOT.2@-2796.04,2602.36 ccw(c-2756.22,2598.16) -2784.54,2569.84 ; Y-MOT.2@-2796.04,2602.36 ccw(c-2756.22,2598.16) -2784.54,2569.84 ; Y-MOT.2@-2796.04,2602.36 ccw(c-2756.22,2598.16) -2784.54,2569.84 ; Y-MOT.2@-2796.04,2602.36 ccw(c-2756.22,2598.16) -2784.54,2569.84
NetU6_1: U6.1 Z-MOT.1 | length 1438.1
  TopLayer w10: U6.1@-2071.54,1967.88 ccw(c-2081.52,1964.86) -2084.54,1974.84 ccw(c-2078.55,1973.86) -2079.54,1967.88 U6.1@-2042.54,1967.88
  TopLayer w20: -2126.54,2016.84 -2084.54,1974.84
  TopLayer w25: -2214.54,2484.84 -2214.54,2574.84 -2184.54,2604.84 Z-MOT.1@-2114.54,2604.84 ; -2214.54,2571.93 -2214.54,2140.8 -2126.54,2052.8 -2126.54,2016.84 ; -2169.9,2604.84 cw(c-2169.9,2549.48) Z-MOT.1@-2130.75,2588.63 ; -2169.9,2604.84 ccw(c-2169.9,2660.21) Z-MOT.1@-2130.75,2621.06 ; -2169.9,2604.84 cw(c-2169.9,2549.48) Z-MOT.1@-2130.75,2588.63 ; -2169.9,2604.84 ccw(c-2169.9,2660.21) Z-MOT.1@-2130.75,2621.06 ; -2169.9,2604.84 cw(c-2169.9,2549.48) Z-MOT.1@-2130.75,2588.63 ; -2169.9,2604.84 ccw(c-2169.9,2660.21) Z-MOT.1@-2130.75,2621.06 ; -2169.9,2604.84 ccw(c-2169.9,2660.21) Z-MOT.1@-2130.75,2621.06 ; -2169.9,2604.84 cw(c-2169.9,2549.48) Z-MOT.1@-2130.75,2588.63 ; -2169.9,2604.84 ccw(c-2169.9,2660.21) Z-MOT.1@-2130.75,2621.06 ; -2169.9,2604.84 cw(c-2169.9,2549.48) Z-MOT.1@-2130.75,2588.63 ; -2169.9,2604.84 ccw(c-2169.9,2660.21) Z-MOT.1@-2130.75,2621.06 ; -2169.9,2604.84 cw(c-2169.9,2549.48) Z-MOT.1@-2130.75,2588.63
NetU6_26: U6.26 Z-MOT.2 | length 1112
  TopLayer w10: U6.26@-1975.62,2017.79 -1975.62,2075.84
  TopLayer w23.62: Z-MOT.2@-2014.54,2604.84 -1975.62,2565.93 ; -1975.62,2075.84 -1975.62,2565.93 ; Z-MOT.2@-2013.93,2581.23 cw(c-2012.59,2528.96) -1975.62,2565.93 ; Z-MOT.2@-2013.93,2581.23 cw(c-2012.59,2528.96) -1975.62,2565.93 ; Z-MOT.2@-2013.93,2581.23 cw(c-2012.59,2528.96) -1975.62,2565.93 ; Z-MOT.2@-2013.93,2581.23 cw(c-2012.59,2528.96) -1975.62,2565.93 ; Z-MOT.2@-2013.93,2581.23 cw(c-2012.59,2528.96) -1975.62,2565.93 ; Z-MOT.2@-2013.93,2581.23 cw(c-2012.59,2528.96) -1975.62,2565.93 ; Z-MOT.2@-1990.92,2604.24 ccw(c-1938.65,2602.9) -1975.62,2565.93 ; Z-MOT.2@-1990.92,2604.24 ccw(c-1938.65,2602.9) -1975.62,2565.93 ; Z-MOT.2@-1990.92,2604.24 ccw(c-1938.65,2602.9) -1975.62,2565.93 ; Z-MOT.2@-1990.92,2604.24 ccw(c-1938.65,2602.9) -1975.62,2565.93 ; Z-MOT.2@-1990.92,2604.24 ccw(c-1938.65,2602.9) -1975.62,2565.93 ; Z-MOT.2@-1990.92,2604.24 ccw(c-1938.65,2602.9) -1975.62,2565.93
NetU7_1: E-MOT.1 U7.1 | length 1180.2
  TopLayer w10: E-MOT.1@-1422.54,2589.8 E-MOT.1@-1407.49,2604.84 ; -1310.54,1983.84 ccw(c-1297.05,1981.36) -1299.54,1967.88 U7.1@-1270.62,1967.88 ; -1309.11,1984.42 cw(c-1308.1,1966.86) U7.1@-1290.54,1967.88
  TopLayer w20: -1360.54,2035.84 -1302.54,1977.84
  TopLayer w25: E-MOT.1@-1422.54,2589.8 -1422.54,2440.84 -1422.54,2137.8 -1360.54,2075.8 -1360.54,2035.84 ; -1422.54,2513.15 cw(c-1315.8,2513.15) E-MOT.1@-1391.27,2588.63 ; -1422.54,2513.15 cw(c-1315.8,2513.15) E-MOT.1@-1391.27,2588.63 ; -1422.54,2513.15 cw(c-1315.8,2513.15) E-MOT.1@-1391.27,2588.63 ; -1422.54,2513.15 cw(c-1315.8,2513.15) E-MOT.1@-1391.27,2588.63 ; -1422.54,2513.15 cw(c-1315.8,2513.15) E-MOT.1@-1391.27,2588.63
NetU7_26: E-MOT.2 U7.26 | length 1271.3
  TopLayer w10: E-MOT.2@-1307.49,2583.8 E-MOT.2@-1307.49,2604.84 ; U7.26@-1195.62,2002.88 -1195.62,2076.84
  TopLayer w23.62: E-MOT.2@-1307.49,2583.8 -1195.62,2471.93 -1195.62,2433.84 -1195.62,2076.84 ; E-MOT.2@-1307.49,2604.84 ccw(c-1256.68,2604.84) -1292.61,2568.91 ; E-MOT.2@-1307.49,2604.84 ccw(c-1256.68,2604.84) -1292.61,2568.91 ; E-MOT.2@-1307.49,2604.84 ccw(c-1256.68,2604.84) -1292.61,2568.91 ; E-MOT.2@-1307.49,2604.84 ccw(c-1256.68,2604.84) -1292.61,2568.91 ; E-MOT.2@-1307.49,2604.84 ccw(c-1256.68,2604.84) -1292.61,2568.91 ; E-MOT.2@-1283.87,2604.84 ccw(c-1176.03,2604.84) -1252.28,2528.59 ; E-MOT.2@-1283.87,2604.84 ccw(c-1176.03,2604.84) -1252.28,2528.59 ; E-MOT.2@-1283.87,2604.84 ccw(c-1176.03,2604.84) -1252.28,2528.59 ; E-MOT.2@-1283.87,2604.84 ccw(c-1176.03,2604.84) -1252.28,2528.59 ; E-MOT.2@-1283.87,2604.84 ccw(c-1176.03,2604.84) -1252.28,2528.59
NetX-MOT_3: U3.24 X-MOT.3 | length 1990.8
  TopLayer w10: U3.24@-3541.62,2020.84 -3541.62,2077.84
  TopLayer w23.62: -3541.62,2077.84 -3541.62,2577.76 ; -3541.62,2482.42 cw(c-3392.11,2482.42) X-MOT.3@-3497.83,2588.14 ; -3541.62,2482.42 cw(c-3392.11,2482.42) X-MOT.3@-3497.83,2588.14 ; -3541.62,2482.42 cw(c-3392.11,2482.42) X-MOT.3@-3497.83,2588.14 ; -3541.62,2482.42 cw(c-3392.11,2482.42) X-MOT.3@-3497.83,2588.14 ; -3541.62,2482.42 cw(c-3392.11,2482.42) X-MOT.3@-3497.83,2588.14 ; -3541.62,2482.42 cw(c-3392.11,2482.42) X-MOT.3@-3497.83,2588.14 ; -3541.62,2539.45 cw(c-3449.14,2539.45) X-MOT.3@-3514.54,2604.84 ; -3541.62,2539.45 cw(c-3449.14,2539.45) X-MOT.3@-3514.54,2604.84 ; -3541.62,2539.45 cw(c-3449.14,2539.45) X-MOT.3@-3514.54,2604.84 ; -3541.62,2539.45 cw(c-3449.14,2539.45) X-MOT.3@-3514.54,2604.84 ; -3541.62,2539.45 cw(c-3449.14,2539.45) X-MOT.3@-3514.54,2604.84 ; -3541.62,2539.45 cw(c-3449.14,2539.45) X-MOT.3@-3514.54,2604.84 ; -3541.62,2577.76 cw(c-3528.01,2564.15) X-MOT.3@-3521.96,2582.42 ; -3541.62,2577.76 ccw(c-3555.23,2591.37) X-MOT.3@-3536.96,2597.42 ; -3541.62,2577.76 cw(c-3528.01,2564.15) X-MOT.3@-3521.96,2582.42 ; -3541.62,2577.76 ccw(c-3555.23,2591.37) X-MOT.3@-3536.96,2597.42 ; -3541.62,2577.76 cw(c-3528.01,2564.15) X-MOT.3@-3521.96,2582.42 ; -3541.62,2577.76 ccw(c-3555.23,2591.37) X-MOT.3@-3536.96,2597.42 ; -3541.62,2577.76 ccw(c-3555.23,2591.37) X-MOT.3@-3536.96,2597.42 ; -3541.62,2577.76 cw(c-3528.01,2564.15) X-MOT.3@-3521.96,2582.42 ; -3541.62,2577.76 ccw(c-3555.23,2591.37) X-MOT.3@-3536.96,2597.42 ; -3541.62,2577.76 cw(c-3528.01,2564.15) X-MOT.3@-3521.96,2582.42 ; -3541.62,2577.76 ccw(c-3555.23,2591.37) X-MOT.3@-3536.96,2597.42 ; -3541.62,2577.76 cw(c-3528.01,2564.15) X-MOT.3@-3521.96,2582.42 ; -3541.62,2577.76 X-MOT.3@-3514.54,2604.84
NetX-MOT_4: U3.21 X-MOT.4 | length 1531.5
  TopLayer w10: U3.21@-3465.62,1967.88 -3412.5,1967.88 cw(c-3421.02,1976.4) -3429.54,1967.88 ; -3435.54,1967.88 ccw(c-3418.52,1999.86) -3386.54,1982.84 ; -3433.54,1967.88 cw(c-3414.22,1957.36) -3403.7,1976.68
  TopLayer w23.62: X-MOT.4@-3414.54,2604.84 -3351.54,2604.84 -3318.54,2571.84 -3318.54,2484.84 ; X-MOT.4@-3397.83,2588.14 cw(c-3357.51,2547.81) -3357.51,2604.84 ; X-MOT.4@-3397.83,2588.14 cw(c-3357.51,2547.81) -3357.51,2604.84 ; X-MOT.4@-3397.83,2588.14 cw(c-3357.51,2547.81) -3357.51,2604.84 ; X-MOT.4@-3397.83,2588.14 cw(c-3357.51,2547.81) -3357.51,2604.84 ; X-MOT.4@-3397.83,2588.14 cw(c-3357.51,2547.81) -3357.51,2604.84 ; X-MOT.4@-3397.83,2588.14 cw(c-3357.51,2547.81) -3357.51,2604.84 ; X-MOT.4@-3397.83,2621.55 ccw(c-3357.51,2661.87) -3357.51,2604.84 ; X-MOT.4@-3397.83,2621.55 ccw(c-3357.51,2661.87) -3357.51,2604.84 ; X-MOT.4@-3397.83,2621.55 ccw(c-3357.51,2661.87) -3357.51,2604.84 ; X-MOT.4@-3397.83,2621.55 ccw(c-3357.51,2661.87) -3357.51,2604.84 ; X-MOT.4@-3397.83,2621.55 ccw(c-3357.51,2661.87) -3357.51,2604.84 ; X-MOT.4@-3397.83,2621.55 ccw(c-3357.51,2661.87) -3357.51,2604.84
  TopLayer w25: -3412.5,1967.88 -3318.54,2061.84 -3318.54,2562.79
NetY-MOT_3: U4.24 Y-MOT.3 | length 2023.6
  TopLayer w10: U4.24@-2745.54,1999.84 -2745.54,2070.84 ; -2745.54,2099.84 ccw(c-2731.04,2085.34) -2745.54,2070.84 ; -2745.54,2106.84 cw(c-2763.54,2088.84) -2745.54,2070.84
  TopLayer w23.62: -2745.54,2070.84 -2745.54,2578.84 ; -2745.54,2485.04 cw(c-2599.74,2485.04) Y-MOT.3@-2702.83,2588.14 ; -2745.54,2485.04 cw(c-2599.74,2485.04) Y-MOT.3@-2702.83,2588.14 ; -2745.54,2485.04 cw(c-2599.74,2485.04) Y-MOT.3@-2702.83,2588.14 ; -2745.54,2485.04 cw(c-2599.74,2485.04) Y-MOT.3@-2702.83,2588.14 ; -2745.54,2485.04 cw(c-2599.74,2485.04) Y-MOT.3@-2702.83,2588.14 ; -2745.54,2485.04 cw(c-2599.74,2485.04) Y-MOT.3@-2702.83,2588.14 ; -2745.54,2542.07 cw(c-2656.77,2542.07) Y-MOT.3@-2719.54,2604.84 ; -2745.54,2542.07 cw(c-2656.77,2542.07) Y-MOT.3@-2719.54,2604.84 ; -2745.54,2542.07 cw(c-2656.77,2542.07) Y-MOT.3@-2719.54,2604.84 ; -2745.54,2542.07 cw(c-2656.77,2542.07) Y-MOT.3@-2719.54,2604.84 ; -2745.54,2542.07 cw(c-2656.77,2542.07) Y-MOT.3@-2719.54,2604.84 ; -2745.54,2542.07 cw(c-2656.77,2542.07) Y-MOT.3@-2719.54,2604.84 ; -2745.53,2578.84 cw(c-2733.65,2566.96) Y-MOT.3@-2727.78,2582.71 ; -2745.53,2578.84 ccw(c-2757.42,2590.73) Y-MOT.3@-2741.67,2596.59 ; -2745.53,2578.84 cw(c-2733.65,2566.96) Y-MOT.3@-2727.78,2582.71 ; -2745.53,2578.84 ccw(c-2757.42,2590.73) Y-MOT.3@-2741.67,2596.59 ; -2745.53,2578.84 cw(c-2733.65,2566.96) Y-MOT.3@-2727.78,2582.71 ; -2745.53,2578.84 ccw(c-2757.42,2590.73) Y-MOT.3@-2741.67,2596.59 ; -2745.53,2578.84 ccw(c-2757.42,2590.73) Y-MOT.3@-2741.67,2596.59 ; -2745.53,2578.84 cw(c-2733.65,2566.96) Y-MOT.3@-2727.78,2582.71 ; -2745.53,2578.84 ccw(c-2757.42,2590.73) Y-MOT.3@-2741.67,2596.59 ; -2745.53,2578.84 cw(c-2733.65,2566.96) Y-MOT.3@-2727.78,2582.71 ; -2745.53,2578.84 ccw(c-2757.42,2590.73) Y-MOT.3@-2741.67,2596.59 ; -2745.53,2578.84 cw(c-2733.65,2566.96) Y-MOT.3@-2727.78,2582.71 ; -2745.54,2578.84 Y-MOT.3@-2719.54,2604.84
NetY-MOT_4: U4.21 Y-MOT.4 | length 1411.6
  TopLayer w10: U4.21@-2669.54,1964.84 -2623.54,1964.84 ; -2636.54,1964.84 ccw(c-2630.04,1991.79) -2623.54,1964.84 ; -2634.54,1964.84 cw(c-2623.04,1959.34) -2617.54,1970.84 cw(c-2623.54,1970.84) -2620.14,1965.9 ; -2603.09,1985.29 cw(c-2630.04,1991.79) -2620.14,1965.9 ; -2623.54,1964.84 ccw(c-2630.04,1991.79) -2620.14,1965.9 ; -2623.54,1964.84 ccw(c-2623.54,1970.84) -2620.14,1965.9
  TopLayer w20: -2617.54,1970.84 -2522.54,2065.84
  TopLayer w23.62: Y-MOT.4@-2619.54,2604.84 -2548.54,2604.84 -2522.54,2578.84 -2522.54,2444.84 ; Y-MOT.4@-2602.83,2588.14 cw(c-2562.51,2547.81) -2562.51,2604.84 ; Y-MOT.4@-2602.83,2588.14 cw(c-2562.51,2547.81) -2562.51,2604.84 ; Y-MOT.4@-2602.83,2588.14 cw(c-2562.51,2547.81) -2562.51,2604.84 ; Y-MOT.4@-2602.83,2588.14 cw(c-2562.51,2547.81) -2562.51,2604.84 ; Y-MOT.4@-2602.83,2588.14 cw(c-2562.51,2547.81) -2562.51,2604.84 ; Y-MOT.4@-2602.83,2588.14 cw(c-2562.51,2547.81) -2562.51,2604.84 ; Y-MOT.4@-2602.83,2621.55 ccw(c-2562.51,2661.87) -2562.51,2604.84 ; Y-MOT.4@-2602.83,2621.55 ccw(c-2562.51,2661.87) -2562.51,2604.84 ; Y-MOT.4@-2602.83,2621.55 ccw(c-2562.51,2661.87) -2562.51,2604.84 ; Y-MOT.4@-2602.83,2621.55 ccw(c-2562.51,2661.87) -2562.51,2604.84 ; Y-MOT.4@-2602.83,2621.55 ccw(c-2562.51,2661.87) -2562.51,2604.84 ; Y-MOT.4@-2602.83,2621.55 ccw(c-2562.51,2661.87) -2562.51,2604.84
  TopLayer w25: -2522.54,2065.84 -2522.54,2444.84
NetZ-MOT_3: U6.24 Z-MOT.3 | length 1264.1
  TopLayer w10: U6.24@-1936.62,2002.88 -1936.62,2073.84
  TopLayer w23.62: -1936.62,2073.84 -1936.62,2582.76 Z-MOT.3@-1914.54,2604.84 ; -1936.62,2494.49 cw(c-1804.18,2494.49) Z-MOT.3@-1897.83,2588.14 ; -1936.62,2494.49 cw(c-1804.18,2494.49) Z-MOT.3@-1897.83,2588.14 ; -1936.62,2494.49 cw(c-1804.18,2494.49) Z-MOT.3@-1897.83,2588.14 ; -1936.62,2494.49 cw(c-1804.18,2494.49) Z-MOT.3@-1897.83,2588.14 ; -1936.62,2551.52 cw(c-1861.21,2551.52) Z-MOT.3@-1914.54,2604.84 ; -1936.62,2551.52 cw(c-1861.21,2551.52) Z-MOT.3@-1914.54,2604.84 ; -1936.62,2551.52 cw(c-1861.21,2551.52) Z-MOT.3@-1914.54,2604.84 ; -1936.62,2551.52 cw(c-1861.21,2551.52) Z-MOT.3@-1914.54,2604.84